# EAGLE board E18 Simple Breakout-Panel (EAGLE 9.6.2)
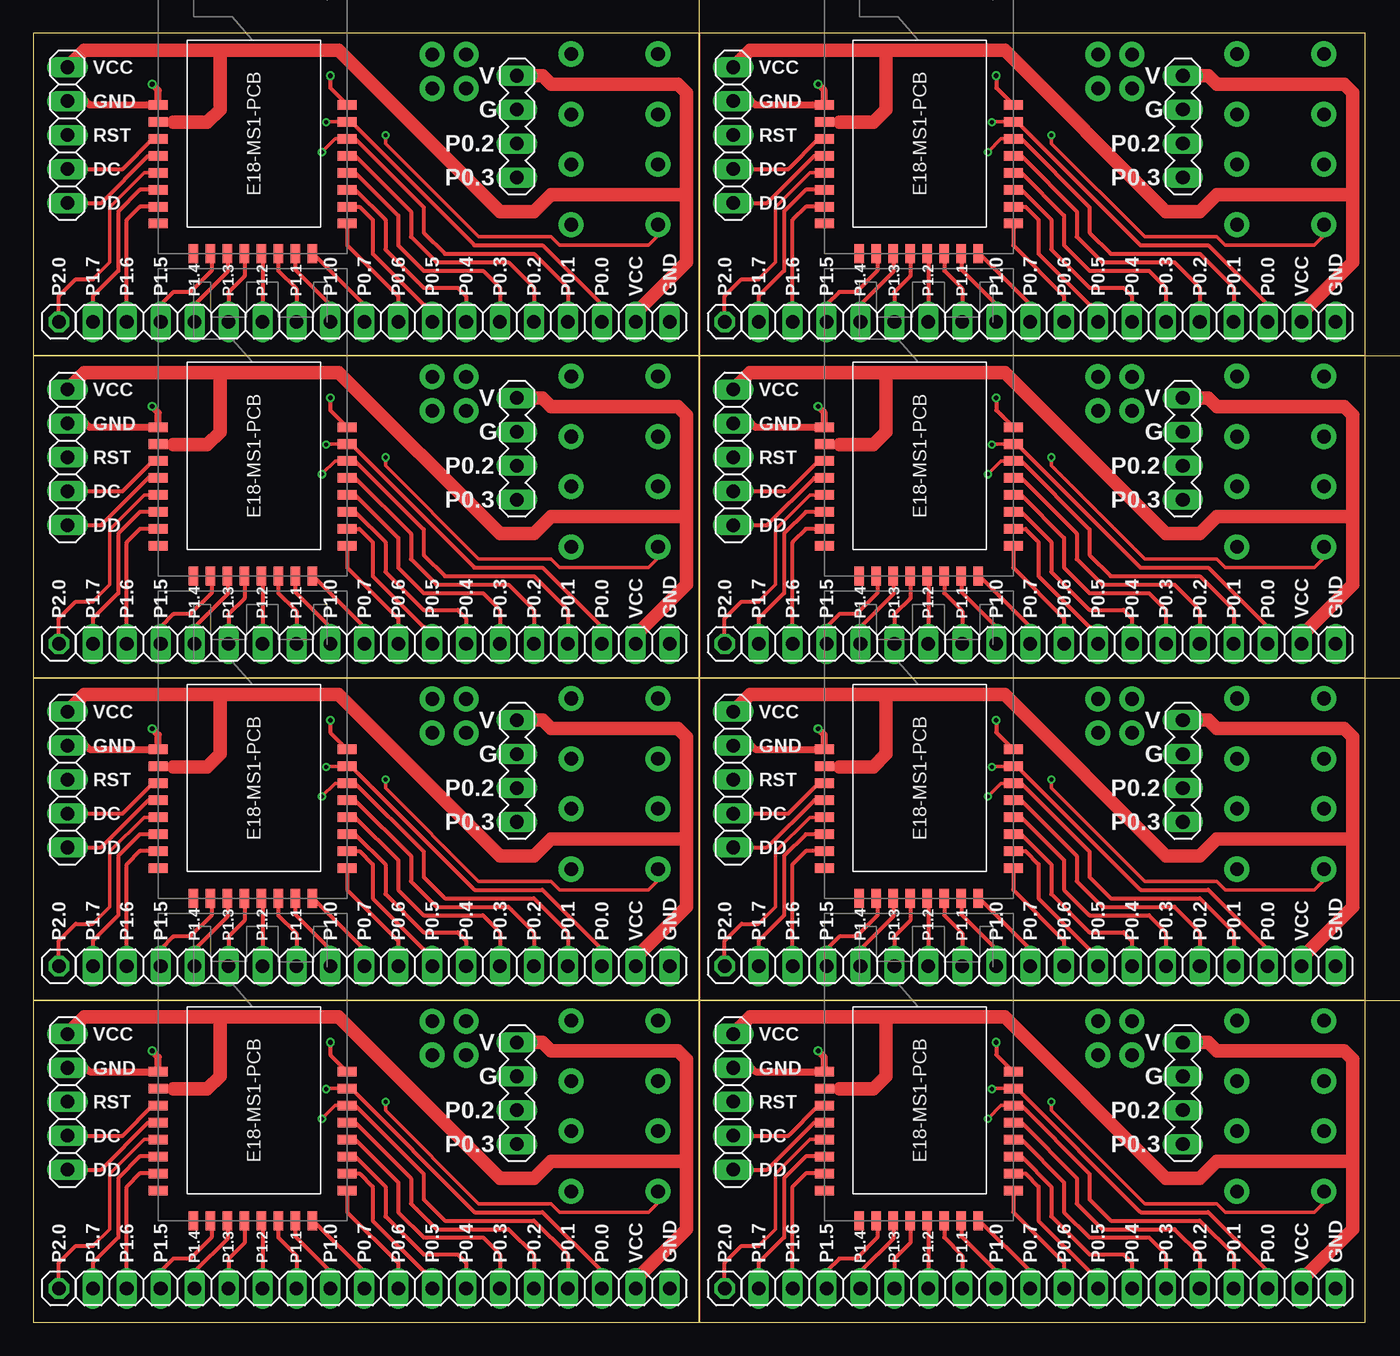
[diagram p0: board, top side]
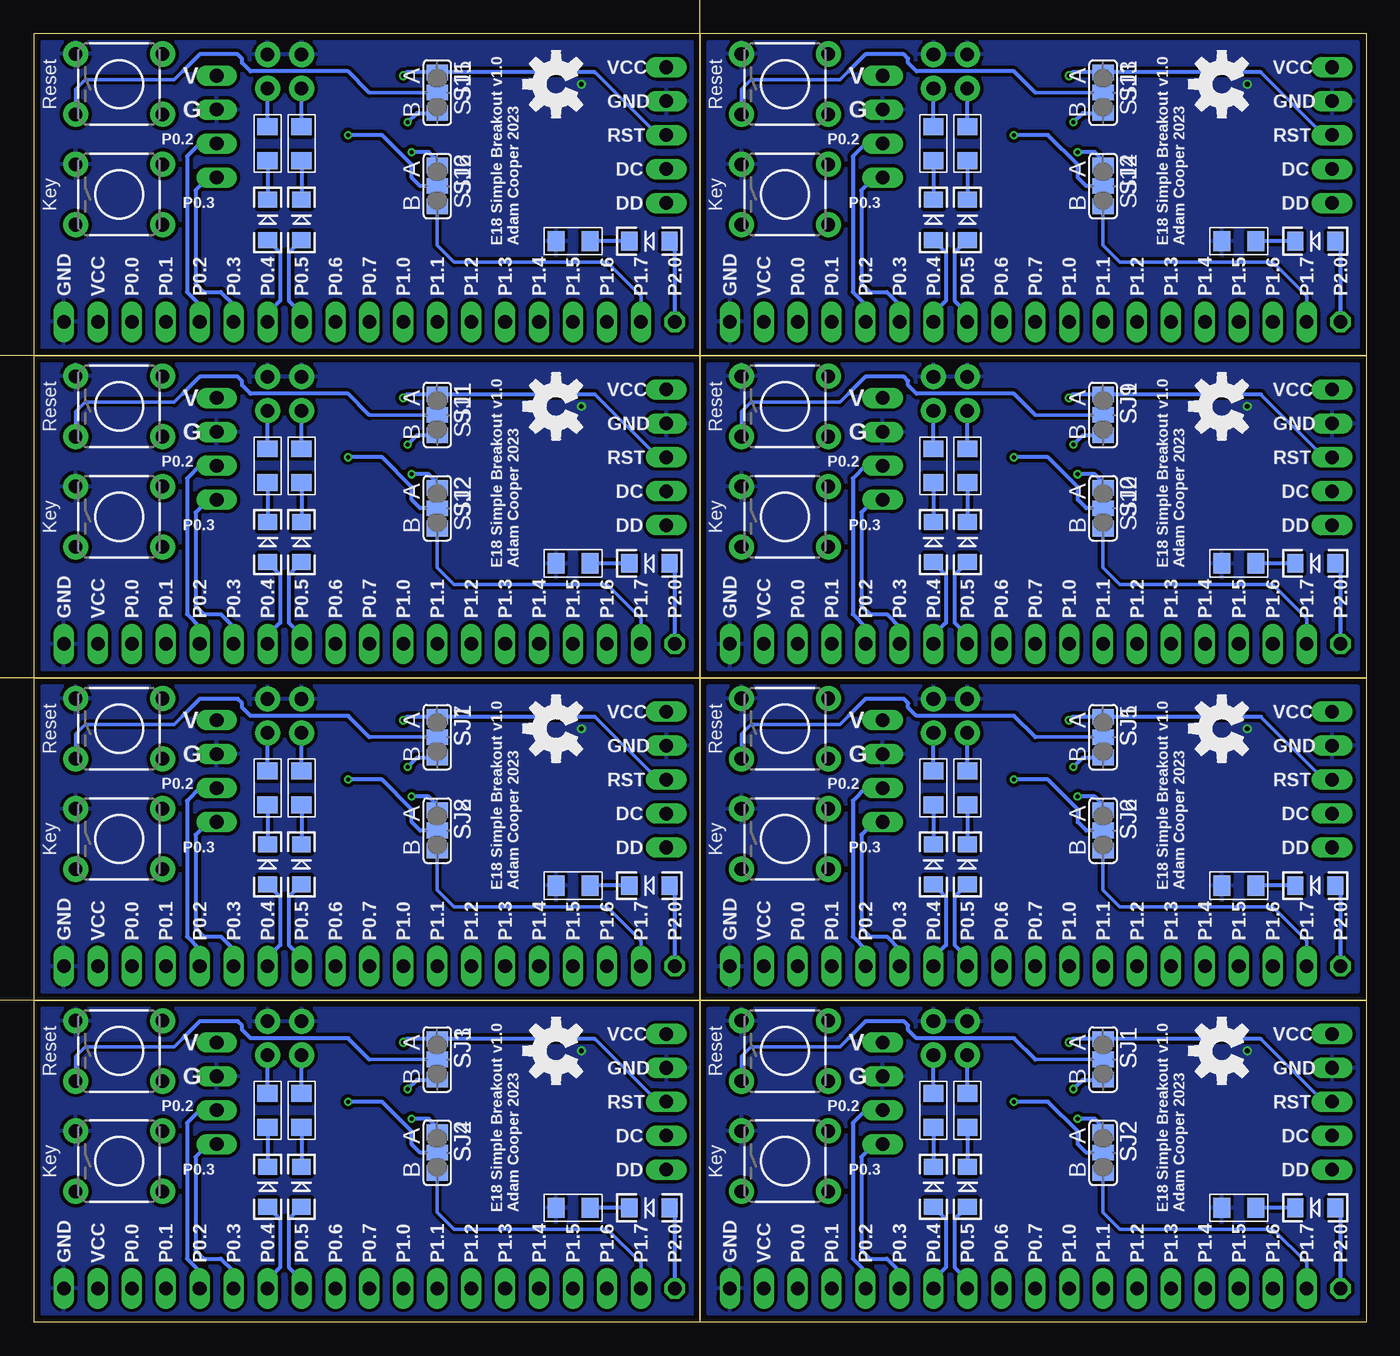
[diagram p1: board, bottom side, seen from below]

Size 99.67 x 96.48 mm. Coordinates in mm from the lower left corner, seen from the top.
Outline: 49.84,24.12 49.84,0 0,0 0,24.12
Outline: 49.84,24.12 0,24.12
Outline: 99.67,24.12 99.67,0 49.84,0 49.84,24.12
Outline: 99.67,24.12 49.84,24.12
Outline: 0,24.12 49.84,24.12
Outline: 49.84,24.12 49.84,48.24
Outline: 49.84,48.24 0,48.24
Outline: 0,48.24 0,24.12
Outline: 49.84,24.12 99.67,24.12
Outline: 99.67,24.12 99.67,48.24
Outline: 99.67,48.24 49.84,48.24
Outline: 49.84,48.24 49.84,24.12
Outline: 0,48.24 49.84,48.24
Outline: 49.84,48.24 49.84,72.36
Outline: 49.84,72.36 0,72.36
Outline: 0,72.36 0,48.24
Outline: 49.84,48.24 99.67,48.24
Outline: 99.67,48.24 99.67,72.36
Outline: 99.67,72.36 49.84,72.36
Outline: 49.84,72.36 49.84,48.24
Outline: 0,72.36 49.84,72.36
Outline: 49.84,72.36 49.84,96.48 0,96.48 0,72.36
Outline: 49.84,72.36 99.67,72.36
Outline: 99.67,72.36 99.67,96.48 49.84,96.48 49.84,72.36
Copper layers (1*16): Top 0.035mm / dielectric 1.5mm / Bottom 0.035mm
Design rules "Seeed Fusion_eagle_rule_v1.1": minimum track width 6mil, minimum drill 12mil, track to track 6mil, track to pad 6mil, pad to pad 6mil, via to via 6mil, smd to smd 0mil, copper to edge 10mil, drill to drill 10mil, minimum pad ring 10mil, minimum via ring 6mil, stop-mask expansion 2mil, vias tented up to drill 100mil, thermal gap 10mil
Milling: 4 lines

## Footprints (pad centres in the part's own frame; a part is rotated, then mirrored left to right if it is on the bottom)
1X05 = drill 1.016 long: 1 -5.08,0; 2 -2.54,0; 3 0,0; 4 2.54,0; 5 5.08,0
1X18 = drill 1.016 long: 1 -21.59,0; 2 -19.05,0; 3 -16.51,0; 4 -13.97,0; 5 -11.43,0; 6 -8.89,0; 7 -6.35,0; 8 -3.81,0; 9 -1.27,0; 10 1.27,0; 11 3.81,0; 12 6.35,0; 13 8.89,0; 14 11.43,0; 15 13.97,0; 16 16.51,0; 17 19.05,0; 18 21.59,0
1X01 = drill 1.016 octagon: 1 0,0
1X02_NO_SILK = drill 1.016 pad 1.88: 1 0,0; 2 2.54,0
LED-1206 = smd 1.2 x 1.4: A -1.5,0; C 1.5,0
1206 = smd 1.27 x 1.524: 1 -1.27,0; 2 1.27,0
TACTILE-PTH = drill 1.016 pad 1.88: 1 -3.251,2.261; 2 3.251,2.261; 3 -3.251,-2.261; 4 3.251,-2.261
SJ_2 = smd 1.168 x 1.6: 1 -1.524,0; 2 0,0; 3 1.524,0
MA04-1 = drill 1.016 long: 1 -3.81,0; 2 -1.27,0; 3 1.27,0; 4 3.81,0
E18-MS1-PCB = smd 0.711 x 1.422: GND 11.15,14.14; NC@1 2.26,14.14; P0.0 9.88,0; P0.1 8.61,0; P0.2 7.34,0; P0.3 6.07,0; P0.4 4.8,0; P0.5 3.53,0; P0.6 2.26,0; P1.6 3.53,14.14; P1.7 4.8,14.14; P2.0 6.07,14.14; P2.1 7.34,14.14; P2.2 8.61,14.14; RST 11.15,0; VCC 9.88,14.14 | smd 1.422 x 0.711: NC@2 0,11.51; P0.7 0,2.62; P1.0 0,3.89; P1.1 0,5.16; P1.2 0,6.43; P1.3 0,7.7; P1.4 0,8.97; P1.5 0,10.24

## Placement (x,y rotation side)
JP1  [1X05]  2.54,16.51 90 top
JP2  [1X18]  26.04,2.54 180 top
JP3  [1X01]  1.91,2.54 0 top
JP4  [1X02_NO_SILK]  32.38,22.54 270 top
JP5  [1X02_NO_SILK]  29.84,22.54 270 top
JP6  [1X05]  52.38,16.51 90 top
JP7  [1X01]  51.74,2.54 0 top
JP8  [1X18]  75.87,2.54 180 top
JP9  [1X02_NO_SILK]  82.22,22.54 270 top
JP10  [1X02_NO_SILK]  79.68,22.54 270 top
JP11  [1X05]  2.54,40.63 90 top
JP12  [1X01]  1.91,26.66 0 top
JP13  [1X18]  26.04,26.66 180 top
JP14  [1X02_NO_SILK]  32.38,46.66 270 top
JP15  [1X02_NO_SILK]  29.84,46.66 270 top
JP16  [1X05]  52.38,40.63 90 top
JP17  [1X01]  51.74,26.66 0 top
JP18  [1X18]  75.87,26.66 180 top
JP19  [1X02_NO_SILK]  82.22,46.66 270 top
JP20  [1X02_NO_SILK]  79.68,46.66 270 top
JP21  [1X05]  2.54,64.75 90 top
JP22  [1X01]  1.91,50.78 0 top
JP23  [1X18]  26.04,50.78 180 top
JP24  [1X02_NO_SILK]  32.38,70.78 270 top
JP25  [1X02_NO_SILK]  29.84,70.78 270 top
JP26  [1X05]  52.38,64.75 90 top
JP27  [1X01]  51.74,50.78 0 top
JP28  [1X18]  75.87,50.78 180 top
JP29  [1X02_NO_SILK]  82.22,70.78 270 top
JP30  [1X02_NO_SILK]  79.68,70.78 270 top
JP31  [1X05]  2.54,88.87 90 top
JP32  [1X01]  1.91,74.9 0 top
JP33  [1X18]  26.04,74.9 180 top
JP34  [1X02_NO_SILK]  32.38,94.9 270 top
JP35  [1X02_NO_SILK]  29.84,94.9 270 top
JP36  [1X05]  52.38,88.87 90 top
JP37  [1X01]  51.74,74.9 0 top
JP38  [1X18]  75.87,74.9 180 top
JP39  [1X02_NO_SILK]  82.22,94.9 270 top
JP40  [1X02_NO_SILK]  79.68,94.9 270 top
LED1  [LED-1206]  3.81,8.57 180 bottom
LED2  [LED-1206]  32.38,10.16 90 bottom
LED3  [LED-1206]  29.84,10.16 90 bottom
LED4  [LED-1206]  53.65,8.57 180 bottom
LED5  [LED-1206]  82.22,10.16 90 bottom
LED6  [LED-1206]  79.68,10.16 90 bottom
LED7  [LED-1206]  3.81,32.69 180 bottom
LED8  [LED-1206]  32.38,34.28 90 bottom
LED9  [LED-1206]  29.84,34.28 90 bottom
LED10  [LED-1206]  53.65,32.69 180 bottom
LED11  [LED-1206]  82.22,34.28 90 bottom
LED12  [LED-1206]  79.68,34.28 90 bottom
LED13  [LED-1206]  3.81,56.81 180 bottom
LED14  [LED-1206]  32.38,58.4 90 bottom
LED15  [LED-1206]  29.84,58.4 90 bottom
LED16  [LED-1206]  53.65,56.81 180 bottom
LED17  [LED-1206]  82.22,58.4 90 bottom
LED18  [LED-1206]  79.68,58.4 90 bottom
LED19  [LED-1206]  3.81,80.93 180 bottom
LED20  [LED-1206]  32.38,82.52 90 bottom
LED21  [LED-1206]  29.84,82.52 90 bottom
LED22  [LED-1206]  53.65,80.93 180 bottom
LED23  [LED-1206]  82.22,82.52 90 bottom
LED24  [LED-1206]  79.68,82.52 90 bottom
LOGO1  OSHW-LOGOM  [OSHW-LOGO-M]  10.79,20.32 90 bottom
LOGO2  OSHW-LOGOM  [OSHW-LOGO-M]  60.63,20.32 90 bottom
LOGO3  OSHW-LOGOM  [OSHW-LOGO-M]  10.79,44.44 90 bottom
LOGO4  OSHW-LOGOM  [OSHW-LOGO-M]  60.63,44.44 90 bottom
LOGO5  OSHW-LOGOM  [OSHW-LOGO-M]  10.79,68.56 90 bottom
LOGO6  OSHW-LOGOM  [OSHW-LOGO-M]  60.63,68.56 90 bottom
LOGO7  OSHW-LOGOM  [OSHW-LOGO-M]  10.79,92.68 90 bottom
LOGO8  OSHW-LOGOM  [OSHW-LOGO-M]  60.63,92.68 90 bottom
R1  [1206]  9.53,8.57 0 bottom
R2  [1206]  32.38,15.88 270 bottom
R3  [1206]  29.84,15.88 270 bottom
R4  [1206]  59.36,8.57 0 bottom
R5  [1206]  82.22,15.88 270 bottom
R6  [1206]  79.68,15.88 270 bottom
R7  [1206]  9.53,32.69 0 bottom
R8  [1206]  32.38,39.99 270 bottom
R9  [1206]  29.84,39.99 270 bottom
R10  [1206]  59.36,32.69 0 bottom
R11  [1206]  82.22,39.99 270 bottom
R12  [1206]  79.68,39.99 270 bottom
R13  [1206]  9.53,56.81 0 bottom
R14  [1206]  32.38,64.11 270 bottom
R15  [1206]  29.84,64.11 270 bottom
R16  [1206]  59.36,56.81 0 bottom
R17  [1206]  82.22,64.11 270 bottom
R18  [1206]  79.68,64.11 270 bottom
R19  [1206]  9.53,80.93 0 bottom
R20  [1206]  32.38,88.23 270 bottom
R21  [1206]  29.84,88.23 270 bottom
R22  [1206]  59.36,80.93 0 bottom
R23  [1206]  82.22,88.23 270 bottom
R24  [1206]  79.68,88.23 270 bottom
S1  Reset  [TACTILE-PTH]  43.5,20.32 0 bottom
S2  Key  [TACTILE-PTH]  43.5,12.06 0 bottom
S3  Reset  [TACTILE-PTH]  93.34,20.32 0 bottom
S4  Key  [TACTILE-PTH]  93.34,12.06 0 bottom
S5  Reset  [TACTILE-PTH]  43.5,44.44 0 bottom
S6  Key  [TACTILE-PTH]  43.5,36.18 0 bottom
S7  Reset  [TACTILE-PTH]  93.34,44.44 0 bottom
S8  Key  [TACTILE-PTH]  93.34,36.18 0 bottom
S9  Reset  [TACTILE-PTH]  43.5,68.56 0 bottom
S10  Key  [TACTILE-PTH]  43.5,60.3 0 bottom
S11  Reset  [TACTILE-PTH]  93.34,68.56 0 bottom
S12  Key  [TACTILE-PTH]  93.34,60.3 0 bottom
S13  Reset  [TACTILE-PTH]  43.5,92.68 0 bottom
S14  Key  [TACTILE-PTH]  43.5,84.42 0 bottom
S15  Reset  [TACTILE-PTH]  93.34,92.68 0 bottom
S16  Key  [TACTILE-PTH]  93.34,84.42 0 bottom
SJ1  [SJ_2]  19.68,19.68 270 bottom
SJ2  [SJ_2]  19.68,12.7 270 bottom
SJ3  [SJ_2]  69.52,19.68 270 bottom
SJ4  [SJ_2]  69.52,12.7 270 bottom
SJ5  [SJ_2]  19.68,43.8 270 bottom
SJ6  [SJ_2]  19.68,36.82 270 bottom
SJ7  [SJ_2]  69.52,43.8 270 bottom
SJ8  [SJ_2]  69.52,36.82 270 bottom
SJ9  [SJ_2]  19.68,67.92 270 bottom
SJ10  [SJ_2]  19.68,60.94 270 bottom
SJ11  [SJ_2]  69.52,67.92 270 bottom
SJ12  [SJ_2]  69.52,60.94 270 bottom
SJ13  [SJ_2]  19.68,92.04 270 bottom
SJ14  [SJ_2]  19.68,85.06 270 bottom
SJ15  [SJ_2]  69.52,92.04 270 bottom
SJ16  [SJ_2]  69.52,85.06 270 bottom
SV1  [MA04-1]  36.2,17.14 270 top
SV2  [MA04-1]  86.03,17.14 270 top
SV3  [MA04-1]  36.2,41.26 270 top
SV4  [MA04-1]  86.03,41.26 270 top
SV5  [MA04-1]  36.2,65.38 270 top
SV6  [MA04-1]  86.03,65.38 270 top
SV7  [MA04-1]  36.2,89.5 270 top
SV8  [MA04-1]  86.03,89.5 270 top
U$1  E18-MS1PCB  [E18-MS1-PCB]  23.5,7.62 90 top
U$2  E18-MS1PCB  [E18-MS1-PCB]  73.33,7.62 90 top
U$3  E18-MS1PCB  [E18-MS1-PCB]  23.5,31.74 90 top
U$4  E18-MS1PCB  [E18-MS1-PCB]  73.33,31.74 90 top
U$5  E18-MS1PCB  [E18-MS1-PCB]  23.5,55.86 90 top
U$6  E18-MS1PCB  [E18-MS1-PCB]  73.33,55.86 90 top
U$7  E18-MS1PCB  [E18-MS1-PCB]  23.5,79.98 90 top
U$8  E18-MS1PCB  [E18-MS1-PCB]  73.33,79.98 90 top

## Library data of the parts
JP1-JP3 JP6-JP8 JP11-JP13 JP16-JP18 JP21-JP23 JP26-JP28 JP31-JP33 JP36-JP38 = pinhead
JP4 JP5 JP9 JP10 JP14 JP15 JP19 JP20 JP24 JP25 JP29 JP30 JP34 JP35 JP39 JP40 LED1-LED24 LOGO1-LOGO8 R1-R24 S1-S16 SJ1-SJ16 = Master 2016
SV1-SV8 = Master 2016; OC_FARNELL: unknown; OC_NEWARK: unknown
U$1-U$8 = SMD Stamp Modules

## Nets
GND: JP1.4 JP2.1 JP4.1 JP5.1 R1.1 S1.1 S2.1 SV1.2 U$1.GND
GND1: JP6.4 JP8.1 JP9.1 JP10.1 R4.1 S3.1 S4.1 SV2.2 U$2.GND
GND2: JP11.4 JP13.1 JP14.1 JP15.1 R7.1 S5.1 S6.1 SV3.2 U$3.GND
GND3: JP16.4 JP18.1 JP19.1 JP20.1 R10.1 S7.1 S8.1 SV4.2 U$4.GND
GND4: JP21.4 JP23.1 JP24.1 JP25.1 R13.1 S9.1 S10.1 SV5.2 U$5.GND
GND5: JP26.4 JP28.1 JP29.1 JP30.1 R16.1 S11.1 S12.1 SV6.2 U$6.GND
GND6: JP31.4 JP33.1 JP34.1 JP35.1 R19.1 S13.1 S14.1 SV7.2 U$7.GND
GND7: JP36.4 JP38.1 JP39.1 JP40.1 R22.1 S15.1 S16.1 SV8.2 U$8.GND
N$1: LED3.C R3.2
N$2: S1.3 SJ1.2
N$3: JP4.2 R2.1
N$4: JP5.2 R3.1
N$5: S2.3 SJ2.2
N$6: LED2.C R2.2
N$7: LED1.C R1.2
N$8: S3.3 SJ3.2
N$9: JP9.2 R5.1
N$10: JP10.2 R6.1
N$11: S4.3 SJ4.2
N$12: LED6.C R6.2
N$13: LED5.C R5.2
N$14: LED4.C R4.2
N$15: S5.3 SJ5.2
N$16: JP14.2 R8.1
N$17: JP15.2 R9.1
N$18: S6.3 SJ6.2
N$19: LED9.C R9.2
N$20: LED8.C R8.2
N$21: LED7.C R7.2
N$22: S7.3 SJ7.2
N$23: JP19.2 R11.1
N$24: JP20.2 R12.1
N$25: S8.3 SJ8.2
N$26: LED12.C R12.2
N$27: LED11.C R11.2
N$28: LED10.C R10.2
N$29: S9.3 SJ9.2
N$30: JP24.2 R14.1
N$31: JP25.2 R15.1
N$32: S10.3 SJ10.2
N$33: LED15.C R15.2
N$34: LED14.C R14.2
N$35: LED13.C R13.2
N$36: S11.3 SJ11.2
N$37: JP29.2 R17.1
N$38: JP30.2 R18.1
N$39: S12.3 SJ12.2
N$40: LED18.C R18.2
N$41: LED17.C R17.2
N$42: LED16.C R16.2
N$43: S13.3 SJ13.2
N$44: JP34.2 R20.1
N$45: JP35.2 R21.1
N$46: S14.3 SJ14.2
N$47: LED21.C R21.2
N$48: LED20.C R20.2
N$49: LED19.C R19.2
N$50: S15.3 SJ15.2
N$51: JP39.2 R23.1
N$52: JP40.2 R24.1
N$53: S16.3 SJ16.2
N$54: LED24.C R24.2
N$55: LED23.C R23.2
N$56: LED22.C R22.2
P0_0: JP2.3 SJ1.3 U$1.P0.0
P0_1: JP2.4 SJ2.1 U$1.P0.1
P0_2: JP2.5 SV1.3 U$1.P0.2
P0_3: JP2.6 SV1.4 U$1.P0.3
P0_4: JP2.7 LED2.A U$1.P0.4
P0_5: JP2.8 LED3.A U$1.P0.5
P0_6: JP2.9 U$1.P0.6
P0_7: JP2.10 U$1.P0.7
P0_8: JP8.3 SJ3.3 U$2.P0.0
P0_9: JP8.4 SJ4.1 U$2.P0.1
P0_10: JP8.5 SV2.3 U$2.P0.2
P0_11: JP8.6 SV2.4 U$2.P0.3
P0_12: JP8.7 LED5.A U$2.P0.4
P0_13: JP8.8 LED6.A U$2.P0.5
P0_14: JP8.9 U$2.P0.6
P0_15: JP8.10 U$2.P0.7
P0_16: JP13.3 SJ5.3 U$3.P0.0
P0_17: JP13.4 SJ6.1 U$3.P0.1
P0_18: JP13.5 SV3.3 U$3.P0.2
P0_19: JP13.6 SV3.4 U$3.P0.3
P0_20: JP13.7 LED8.A U$3.P0.4
P0_21: JP13.8 LED9.A U$3.P0.5
P0_22: JP13.9 U$3.P0.6
P0_23: JP13.10 U$3.P0.7
P0_24: JP18.3 SJ7.3 U$4.P0.0
P0_25: JP18.4 SJ8.1 U$4.P0.1
P0_26: JP18.5 SV4.3 U$4.P0.2
P0_27: JP18.6 SV4.4 U$4.P0.3
P0_28: JP18.7 LED11.A U$4.P0.4
P0_29: JP18.8 LED12.A U$4.P0.5
P0_30: JP18.9 U$4.P0.6
P0_31: JP18.10 U$4.P0.7
P0_32: JP23.3 SJ9.3 U$5.P0.0
P0_33: JP23.4 SJ10.1 U$5.P0.1
P0_34: JP23.5 SV5.3 U$5.P0.2
P0_35: JP23.6 SV5.4 U$5.P0.3
P0_36: JP23.7 LED14.A U$5.P0.4
P0_37: JP23.8 LED15.A U$5.P0.5
P0_38: JP23.9 U$5.P0.6
P0_39: JP23.10 U$5.P0.7
P0_40: JP28.3 SJ11.3 U$6.P0.0
P0_41: JP28.4 SJ12.1 U$6.P0.1
P0_42: JP28.5 SV6.3 U$6.P0.2
P0_43: JP28.6 SV6.4 U$6.P0.3
P0_44: JP28.7 LED17.A U$6.P0.4
P0_45: JP28.8 LED18.A U$6.P0.5
P0_46: JP28.9 U$6.P0.6
P0_47: JP28.10 U$6.P0.7
P0_48: JP33.3 SJ13.3 U$7.P0.0
P0_49: JP33.4 SJ14.1 U$7.P0.1
P0_50: JP33.5 SV7.3 U$7.P0.2
P0_51: JP33.6 SV7.4 U$7.P0.3
P0_52: JP33.7 LED20.A U$7.P0.4
P0_53: JP33.8 LED21.A U$7.P0.5
P0_54: JP33.9 U$7.P0.6
P0_55: JP33.10 U$7.P0.7
P0_56: JP38.3 SJ15.3 U$8.P0.0
P0_57: JP38.4 SJ16.1 U$8.P0.1
P0_58: JP38.5 SV8.3 U$8.P0.2
P0_59: JP38.6 SV8.4 U$8.P0.3
P0_60: JP38.7 LED23.A U$8.P0.4
P0_61: JP38.8 LED24.A U$8.P0.5
P0_62: JP38.9 U$8.P0.6
P0_63: JP38.10 U$8.P0.7
P1_0: JP2.11 U$1.P1.0
P1_1: JP2.12 U$1.P1.1
P1_2: JP2.13 U$1.P1.2
P1_3: JP2.14 U$1.P1.3
P1_4: JP2.15 U$1.P1.4
P1_5: JP2.16 U$1.P1.5
P1_6: JP2.17 U$1.P1.6
P1_7: JP2.18 SJ2.3 U$1.P1.7
P1_8: JP8.18 SJ4.3 U$2.P1.7
P1_9: JP8.17 U$2.P1.6
P1_10: JP8.16 U$2.P1.5
P1_11: JP8.15 U$2.P1.4
P1_12: JP8.14 U$2.P1.3
P1_13: JP8.13 U$2.P1.2
P1_14: JP8.12 U$2.P1.1
P1_15: JP8.11 U$2.P1.0
P1_16: JP13.18 SJ6.3 U$3.P1.7
P1_17: JP13.17 U$3.P1.6
P1_18: JP13.16 U$3.P1.5
P1_19: JP13.15 U$3.P1.4
P1_20: JP13.14 U$3.P1.3
P1_21: JP13.13 U$3.P1.2
P1_22: JP13.12 U$3.P1.1
P1_23: JP13.11 U$3.P1.0
P1_24: JP18.18 SJ8.3 U$4.P1.7
P1_25: JP18.17 U$4.P1.6
P1_26: JP18.16 U$4.P1.5
P1_27: JP18.15 U$4.P1.4
P1_28: JP18.14 U$4.P1.3
P1_29: JP18.13 U$4.P1.2
P1_30: JP18.12 U$4.P1.1
P1_31: JP18.11 U$4.P1.0
P1_32: JP23.18 SJ10.3 U$5.P1.7
P1_33: JP23.17 U$5.P1.6
P1_34: JP23.16 U$5.P1.5
P1_35: JP23.15 U$5.P1.4
P1_36: JP23.14 U$5.P1.3
P1_37: JP23.13 U$5.P1.2
P1_38: JP23.12 U$5.P1.1
P1_39: JP23.11 U$5.P1.0
P1_40: JP28.18 SJ12.3 U$6.P1.7
P1_41: JP28.17 U$6.P1.6
P1_42: JP28.16 U$6.P1.5
P1_43: JP28.15 U$6.P1.4
P1_44: JP28.14 U$6.P1.3
P1_45: JP28.13 U$6.P1.2
P1_46: JP28.12 U$6.P1.1
P1_47: JP28.11 U$6.P1.0
P1_48: JP33.18 SJ14.3 U$7.P1.7
P1_49: JP33.17 U$7.P1.6
P1_50: JP33.16 U$7.P1.5
P1_51: JP33.15 U$7.P1.4
P1_52: JP33.14 U$7.P1.3
P1_53: JP33.13 U$7.P1.2
P1_54: JP33.12 U$7.P1.1
P1_55: JP33.11 U$7.P1.0
P1_56: JP38.18 SJ16.3 U$8.P1.7
P1_57: JP38.17 U$8.P1.6
P1_58: JP38.16 U$8.P1.5
P1_59: JP38.15 U$8.P1.4
P1_60: JP38.14 U$8.P1.3
P1_61: JP38.13 U$8.P1.2
P1_62: JP38.12 U$8.P1.1
P1_63: JP38.11 U$8.P1.0
P2_0: JP3.1 LED1.A U$1.P2.0
P2_1: JP1.1 U$1.P2.1
P2_2: JP1.2 U$1.P2.2
P2_3: JP6.2 U$2.P2.2
P2_4: JP6.1 U$2.P2.1
P2_5: JP7.1 LED4.A U$2.P2.0
P2_6: JP11.2 U$3.P2.2
P2_7: JP11.1 U$3.P2.1
P2_8: JP12.1 LED7.A U$3.P2.0
P2_9: JP16.2 U$4.P2.2
P2_10: JP16.1 U$4.P2.1
P2_11: JP17.1 LED10.A U$4.P2.0
P2_12: JP21.2 U$5.P2.2
P2_13: JP21.1 U$5.P2.1
P2_14: JP22.1 LED13.A U$5.P2.0
P2_15: JP26.2 U$6.P2.2
P2_16: JP26.1 U$6.P2.1
P2_17: JP27.1 LED16.A U$6.P2.0
P2_18: JP31.2 U$7.P2.2
P2_19: JP31.1 U$7.P2.1
P2_20: JP32.1 LED19.A U$7.P2.0
P2_21: JP36.2 U$8.P2.2
P2_22: JP36.1 U$8.P2.1
P2_23: JP37.1 LED22.A U$8.P2.0
RST: JP1.3 SJ1.1 U$1.RST
RST1: JP6.3 SJ3.1 U$2.RST
RST2: JP11.3 SJ5.1 U$3.RST
RST3: JP16.3 SJ7.1 U$4.RST
RST4: JP21.3 SJ9.1 U$5.RST
RST5: JP26.3 SJ11.1 U$6.RST
RST6: JP31.3 SJ13.1 U$7.RST
RST7: JP36.3 SJ15.1 U$8.RST
VCC: JP1.5 JP2.2 SV1.1 U$1.VCC
VCC1: JP6.5 JP8.2 SV2.1 U$2.VCC
VCC2: JP11.5 JP13.2 SV3.1 U$3.VCC
VCC3: JP16.5 JP18.2 SV4.1 U$4.VCC
VCC4: JP21.5 JP23.2 SV5.1 U$5.VCC
VCC5: JP26.5 JP28.2 SV6.1 U$6.VCC
VCC6: JP31.5 JP33.2 SV7.1 U$7.VCC
VCC7: JP36.5 JP38.2 SV8.1 U$8.VCC

## Tracks (layer width: path | path; a pad name or v marks a point on that pad's centre or on a via)
GND  (via drill 0.35 pad 0.61)
  Top 0.508: v8.89,20.32 9.36,19.86 U$1.GND 4.2,18.77 3.92,19.05 JP1.4
  pour Bottom (isolate 0.254): 0.64,23.5 0.64,0.64 49.21,0.64 49.21,23.5
GND1  (via drill 0.35 pad 0.61)
  Top 0.508: v58.73,20.32 59.2,19.86 U$2.GND 54.04,18.77 53.76,19.05 JP6.4
  pour Bottom (isolate 0.254): 50.47,23.5 50.47,0.64 99.05,0.64 99.05,23.5
GND2  (via drill 0.35 pad 0.61)
  Top 0.508: v8.89,44.44 9.36,43.98 U$3.GND 4.2,42.89 3.92,43.17 JP11.4
  pour Bottom (isolate 0.254): 0.64,47.61 0.64,24.75 49.21,24.75 49.21,47.61
GND3  (via drill 0.35 pad 0.61)
  Top 0.508: v58.73,44.44 59.2,43.98 U$4.GND 54.04,42.89 53.76,43.17 JP16.4
  pour Bottom (isolate 0.254): 50.47,47.61 50.47,24.75 99.05,24.75 99.05,47.61
GND4  (via drill 0.35 pad 0.61)
  Top 0.508: v8.89,68.56 9.36,68.09 U$5.GND 4.2,67.01 3.92,67.29 JP21.4
  pour Bottom (isolate 0.254): 0.64,71.73 0.64,48.87 49.21,48.87 49.21,71.73
GND5  (via drill 0.35 pad 0.61)
  Top 0.508: v58.73,68.56 59.2,68.09 U$6.GND 54.04,67.01 53.76,67.29 JP26.4
  pour Bottom (isolate 0.254): 50.47,71.73 50.47,48.87 99.05,48.87 99.05,71.73
GND6  (via drill 0.35 pad 0.61)
  Top 0.508: v8.89,92.68 9.36,92.22 U$7.GND 4.2,91.13 3.92,91.41 JP31.4
  pour Bottom (isolate 0.254): 0.64,95.85 0.64,72.99 49.21,72.99 49.21,95.85
GND7  (via drill 0.35 pad 0.61)
  Top 0.508: v58.73,92.68 59.2,92.22 U$8.GND 54.04,91.13 53.76,91.41 JP36.4
  pour Bottom (isolate 0.254): 50.47,95.85 50.47,72.99 99.05,72.99 99.05,95.85
N$1
  Bottom 0.305: R3.2 LED3.C
N$2
  Bottom 0.254: 38.73,21.27 39.37,20.64 46.04,20.64 46.75,19.93 S1.3 | SJ1.2 24.77,19.68
  Bottom 0.305: 24.77,19.68 26.35,21.27 33.66,21.27 34.29,21.91 34.29,22.23 34.61,22.54 37.47,22.54 38.73,21.27
N$3
  Bottom 0.305: R2.1 JP4.2
N$4
  Bottom 0.305: R3.1 JP5.2
N$5  (via drill 0.3 pad 0.61)
  Top 0.254: S2.3 46.75,8.97 46.04,8.26 39.37,8.26 38.73,8.89 33.34,8.89 26.35,15.88 v26.35,16.51
  Bottom 0.305: SJ2.2 20.95,12.7 21.59,13.34 21.59,14.29 23.81,16.51 v26.35,16.51
N$6
  Bottom 0.305: R2.2 LED2.C
N$7
  Bottom 0.305: LED1.C R1.2
N$8
  Bottom 0.254: 88.58,21.27 89.21,20.64 95.88,20.64 96.59,19.93 S3.3 | SJ3.2 74.61,19.68
  Bottom 0.305: 74.61,19.68 76.19,21.27 83.5,21.27 84.13,21.91 84.13,22.23 84.45,22.54 87.31,22.54 88.58,21.27
N$9
  Bottom 0.305: R5.1 JP9.2
N$10
  Bottom 0.305: R6.1 JP10.2
N$11  (via drill 0.3 pad 0.61)
  Top 0.254: S4.3 96.59,8.97 95.88,8.26 89.21,8.26 88.58,8.89 83.18,8.89 76.19,15.88 v76.19,16.51
  Bottom 0.305: SJ4.2 70.8,12.7 71.43,13.34 71.43,14.29 73.65,16.51 v76.19,16.51
N$12
  Bottom 0.305: R6.2 LED6.C
N$13
  Bottom 0.305: R5.2 LED5.C
N$14
  Bottom 0.305: LED4.C R4.2
N$15
  Bottom 0.254: 38.73,45.39 39.37,44.76 46.04,44.76 46.75,44.05 S5.3 | SJ5.2 24.77,43.8
  Bottom 0.305: 24.77,43.8 26.35,45.39 33.66,45.39 34.29,46.03 34.29,46.34 34.61,46.66 37.47,46.66 38.73,45.39
N$16
  Bottom 0.305: R8.1 JP14.2
N$17
  Bottom 0.305: R9.1 JP15.2
N$18  (via drill 0.3 pad 0.61)
  Top 0.254: S6.3 46.75,33.09 46.04,32.38 39.37,32.38 38.73,33.01 33.34,33.01 26.35,39.99 v26.35,40.63
  Bottom 0.305: SJ6.2 20.95,36.82 21.59,37.45 21.59,38.41 23.81,40.63 v26.35,40.63
N$19
  Bottom 0.305: R9.2 LED9.C
N$20
  Bottom 0.305: R8.2 LED8.C
N$21
  Bottom 0.305: LED7.C R7.2
N$22
  Bottom 0.254: 88.58,45.39 89.21,44.76 95.88,44.76 96.59,44.05 S7.3 | SJ7.2 74.61,43.8
  Bottom 0.305: 74.61,43.8 76.19,45.39 83.5,45.39 84.13,46.03 84.13,46.34 84.45,46.66 87.31,46.66 88.58,45.39
N$23
  Bottom 0.305: R11.1 JP19.2
N$24
  Bottom 0.305: R12.1 JP20.2
N$25  (via drill 0.3 pad 0.61)
  Top 0.254: S8.3 96.59,33.09 95.88,32.38 89.21,32.38 88.58,33.01 83.18,33.01 76.19,39.99 v76.19,40.63
  Bottom 0.305: SJ8.2 70.8,36.82 71.43,37.45 71.43,38.41 73.65,40.63 v76.19,40.63
N$26
  Bottom 0.305: R12.2 LED12.C
N$27
  Bottom 0.305: R11.2 LED11.C
N$28
  Bottom 0.305: LED10.C R10.2
N$29
  Bottom 0.254: 38.73,69.51 39.37,68.88 46.04,68.88 46.75,68.17 S9.3 | SJ9.2 24.77,67.92
  Bottom 0.305: 24.77,67.92 26.35,69.51 33.66,69.51 34.29,70.15 34.29,70.47 34.61,70.78 37.47,70.78 38.73,69.51
N$30
  Bottom 0.305: R14.1 JP24.2
N$31
  Bottom 0.305: R15.1 JP25.2
N$32  (via drill 0.3 pad 0.61)
  Top 0.254: S10.3 46.75,57.21 46.04,56.49 39.37,56.49 38.73,57.13 33.34,57.13 26.35,64.11 v26.35,64.75
  Bottom 0.305: SJ10.2 20.95,60.94 21.59,61.58 21.59,62.53 23.81,64.75 v26.35,64.75
N$33
  Bottom 0.305: R15.2 LED15.C
N$34
  Bottom 0.305: R14.2 LED14.C
N$35
  Bottom 0.305: LED13.C R13.2
N$36
  Bottom 0.254: 88.58,69.51 89.21,68.88 95.88,68.88 96.59,68.17 S11.3 | SJ11.2 74.61,67.92
  Bottom 0.305: 74.61,67.92 76.19,69.51 83.5,69.51 84.13,70.15 84.13,70.47 84.45,70.78 87.31,70.78 88.58,69.51
N$37
  Bottom 0.305: R17.1 JP29.2
N$38
  Bottom 0.305: R18.1 JP30.2
N$39  (via drill 0.3 pad 0.61)
  Top 0.254: S12.3 96.59,57.21 95.88,56.49 89.21,56.49 88.58,57.13 83.18,57.13 76.19,64.11 v76.19,64.75
  Bottom 0.305: SJ12.2 70.8,60.94 71.43,61.58 71.43,62.53 73.65,64.75 v76.19,64.75
N$40
  Bottom 0.305: R18.2 LED18.C
N$41
  Bottom 0.305: R17.2 LED17.C
N$42
  Bottom 0.305: LED16.C R16.2
N$43
  Bottom 0.254: 38.73,93.63 39.37,93 46.04,93 46.75,92.29 S13.3 | SJ13.2 24.77,92.05
  Bottom 0.305: 24.77,92.05 26.35,93.63 33.66,93.63 34.29,94.27 34.29,94.58 34.61,94.9 37.47,94.9 38.73,93.63
N$44
  Bottom 0.305: R20.1 JP34.2
N$45
  Bottom 0.305: R21.1 JP35.2
N$46  (via drill 0.3 pad 0.61)
  Top 0.254: S14.3 46.75,81.33 46.04,80.61 39.37,80.61 38.73,81.25 33.34,81.25 26.35,88.23 v26.35,88.87
  Bottom 0.305: SJ14.2 20.95,85.06 21.59,85.69 21.59,86.65 23.81,88.87 v26.35,88.87
N$47
  Bottom 0.305: R21.2 LED21.C
N$48
  Bottom 0.305: R20.2 LED20.C
N$49
  Bottom 0.305: LED19.C R19.2
N$50
  Bottom 0.254: 88.58,93.63 89.21,93 95.88,93 96.59,92.29 S15.3 | SJ15.2 74.61,92.05
  Bottom 0.305: 74.61,92.05 76.19,93.63 83.5,93.63 84.13,94.27 84.13,94.58 84.45,94.9 87.31,94.9 88.58,93.63
N$51
  Bottom 0.305: R23.1 JP39.2
N$52
  Bottom 0.305: R24.1 JP40.2
N$53  (via drill 0.3 pad 0.61)
  Top 0.254: S16.3 96.59,81.33 95.88,80.61 89.21,80.61 88.58,81.25 83.18,81.25 76.19,88.23 v76.19,88.87
  Bottom 0.305: SJ16.2 70.8,85.06 71.43,85.69 71.43,86.65 73.65,88.87 v76.19,88.87
N$54
  Bottom 0.305: R24.2 LED24.C
N$55
  Bottom 0.305: R23.2 LED23.C
N$56
  Bottom 0.305: LED22.C R22.2
P0_0  (via drill 0.3 pad 0.61)
  Top 0.254: v21.91,17.46 21.95,17.5 23.81,17.5
  Top 0.305: U$1.P0.0 23.81,17.5 23.81,17.46 33.02,8.26 38.1,8.26 42.55,3.81 JP2.3
  Bottom 0.305: v21.91,17.46 21.21,18.16 SJ1.3
P0_1  (via drill 0.3 pad 0.61)
  Top 0.254: v21.59,15.24 22.58,16.23 U$1.P0.1
  Top 0.305: U$1.P0.1 24.09,16.23 29.21,11.11 29.21,9.21 30.8,7.62 37.47,7.62 40.01,5.08 JP2.4
  Bottom 0.254: SJ2.1 19.68,14.61
  Bottom 0.305: 19.68,14.61 20.32,15.24 v21.59,15.24
P0_2
  Top 0.305: U$1.P0.2 24.09,14.96 28.26,10.79 28.26,8.89 30.16,6.99 35.56,6.99 37.47,5.08 JP2.5
  Bottom 0.305: SV1.3 37.47,15.88 38.42,14.92 38.42,4.76 37.47,3.81 JP2.5
P0_3
  Top 0.305: U$1.P0.3 24.09,13.69 27.3,10.48 27.3,8.26 29.21,6.35 33.66,6.35 34.92,5.08 JP2.6
  Bottom 0.305: SV1.4 36.83,13.34 37.78,12.38 37.78,5.4 37.15,4.76 35.88,4.76 34.92,3.81 JP2.6
P0_4
  Top 0.305: U$1.P0.4 24.09,12.42 26.35,10.16 26.35,7.94 29.21,5.08 31.75,5.08 32.38,4.45 JP2.7
  Bottom 0.305: LED2.A 31.43,7.71 31.43,4.13 32.38,3.17 JP2.7
P0_5
  Top 0.305: U$1.P0.5 24.41,11.15 25.4,10.16 25.4,7.62 29.21,3.81 29.84,3.81 JP2.8
  Bottom 0.305: LED3.A 30.8,7.71 30.8,4.13 29.84,3.17 JP2.8
P0_6
  Top 0.305: U$1.P0.6 23.5,8.26 27.3,4.45 JP2.9
P0_7
  Top 0.305: U$1.P0.7 20.95,7.62 24.77,3.81 JP2.10
P0_8  (via drill 0.3 pad 0.61)
  Top 0.254: v71.75,17.46 71.78,17.5 73.65,17.5
  Top 0.305: U$2.P0.0 73.65,17.5 73.65,17.46 82.86,8.26 87.94,8.26 92.39,3.81 JP8.3
  Bottom 0.305: v71.75,17.46 71.05,18.16 SJ3.3
P0_9  (via drill 0.3 pad 0.61)
  Top 0.254: v71.43,15.24 72.42,16.23 U$2.P0.1
  Top 0.305: U$2.P0.1 73.93,16.23 79.05,11.11 79.05,9.21 80.64,7.62 87.31,7.62 89.84,5.08 JP8.4
  Bottom 0.254: SJ4.1 69.53,14.61
  Bottom 0.305: 69.53,14.61 70.16,15.24 v71.43,15.24
P0_10
  Top 0.305: U$2.P0.2 73.93,14.96 78.1,10.79 78.1,8.89 80,6.99 85.4,6.99 87.31,5.08 JP8.5
  Bottom 0.305: SV2.3 87.31,15.88 88.26,14.92 88.26,4.76 87.31,3.81 JP8.5
P0_11
  Top 0.305: U$2.P0.3 73.93,13.69 77.14,10.48 77.14,8.26 79.05,6.35 83.5,6.35 84.77,5.08 JP8.6
  Bottom 0.305: SV2.4 86.67,13.34 87.62,12.38 87.62,5.4 86.99,4.76 85.72,4.76 84.77,3.81 JP8.6
P0_12
  Top 0.305: U$2.P0.4 73.93,12.42 76.19,10.16 76.19,7.94 79.05,5.08 81.59,5.08 82.22,4.45 JP8.7
  Bottom 0.305: LED5.A 81.27,7.71 81.27,4.13 82.22,3.17 JP8.7
P0_13
  Top 0.305: U$2.P0.5 74.25,11.15 75.24,10.16 75.24,7.62 79.05,3.81 79.69,3.81 JP8.8
  Bottom 0.305: LED6.A 80.64,7.71 80.64,4.13 79.69,3.17 JP8.8
P0_14
  Top 0.305: U$2.P0.6 73.33,8.26 77.14,4.45 JP8.9
P0_15
  Top 0.305: U$2.P0.7 70.8,7.62 74.61,3.81 JP8.10
P0_16  (via drill 0.3 pad 0.61)
  Top 0.254: v21.91,41.58 21.95,41.62 23.81,41.62
  Top 0.305: U$3.P0.0 23.81,41.62 23.81,41.58 33.02,32.38 38.1,32.38 42.55,27.93 JP13.3
  Bottom 0.305: v21.91,41.58 21.21,42.28 SJ5.3
P0_17  (via drill 0.3 pad 0.61)
  Top 0.254: v21.59,39.36 22.58,40.35 U$3.P0.1
  Top 0.305: U$3.P0.1 24.09,40.35 29.21,35.23 29.21,33.33 30.8,31.74 37.47,31.74 40.01,29.2 JP13.4
  Bottom 0.254: SJ6.1 19.68,38.73
  Bottom 0.305: 19.68,38.73 20.32,39.36 v21.59,39.36
P0_18
  Top 0.305: U$3.P0.2 24.09,39.08 28.26,34.91 28.26,33.01 30.16,31.11 35.56,31.11 37.47,29.2 JP13.5
  Bottom 0.305: SV3.3 37.47,39.99 38.42,39.04 38.42,28.88 37.47,27.93 JP13.5
P0_19
  Top 0.305: U$3.P0.3 24.09,37.81 27.3,34.6 27.3,32.38 29.21,30.47 33.66,30.47 34.92,29.2 JP13.6
  Bottom 0.305: SV3.4 36.83,37.45 37.78,36.5 37.78,29.52 37.15,28.88 35.88,28.88 34.92,27.93 JP13.6
P0_20
  Top 0.305: U$3.P0.4 24.09,36.54 26.35,34.28 26.35,32.06 29.21,29.2 31.75,29.2 32.38,28.57 JP13.7
  Bottom 0.305: LED8.A 31.43,31.83 31.43,28.25 32.38,27.3 JP13.7
P0_21
  Top 0.305: U$3.P0.5 24.41,35.27 25.4,34.28 25.4,31.74 29.21,27.93 29.84,27.93 JP13.8
  Bottom 0.305: LED9.A 30.8,31.83 30.8,28.25 29.84,27.3 JP13.8
P0_22
  Top 0.305: U$3.P0.6 23.5,32.38 27.3,28.57 JP13.9
P0_23
  Top 0.305: U$3.P0.7 20.95,31.74 24.77,27.93 JP13.10
P0_24  (via drill 0.3 pad 0.61)
  Top 0.254: v71.75,41.58 71.78,41.62 73.65,41.62
  Top 0.305: U$4.P0.0 73.65,41.62 73.65,41.58 82.86,32.38 87.94,32.38 92.39,27.93 JP18.3
  Bottom 0.305: v71.75,41.58 71.05,42.28 SJ7.3
P0_25  (via drill 0.3 pad 0.61)
  Top 0.254: v71.43,39.36 72.42,40.35 U$4.P0.1
  Top 0.305: U$4.P0.1 73.93,40.35 79.05,35.23 79.05,33.33 80.64,31.74 87.31,31.74 89.84,29.2 JP18.4
  Bottom 0.254: SJ8.1 69.53,38.73
  Bottom 0.305: 69.53,38.73 70.16,39.36 v71.43,39.36
P0_26
  Top 0.305: U$4.P0.2 73.93,39.08 78.1,34.91 78.1,33.01 80,31.11 85.4,31.11 87.31,29.2 JP18.5
  Bottom 0.305: SV4.3 87.31,39.99 88.26,39.04 88.26,28.88 87.31,27.93 JP18.5
P0_27
  Top 0.305: U$4.P0.3 73.93,37.81 77.14,34.6 77.14,32.38 79.05,30.47 83.5,30.47 84.77,29.2 JP18.6
  Bottom 0.305: SV4.4 86.67,37.45 87.62,36.5 87.62,29.52 86.99,28.88 85.72,28.88 84.77,27.93 JP18.6
P0_28
  Top 0.305: U$4.P0.4 73.93,36.54 76.19,34.28 76.19,32.06 79.05,29.2 81.59,29.2 82.22,28.57 JP18.7
  Bottom 0.305: LED11.A 81.27,31.83 81.27,28.25 82.22,27.3 JP18.7
P0_29
  Top 0.305: U$4.P0.5 74.25,35.27 75.24,34.28 75.24,31.74 79.05,27.93 79.69,27.93 JP18.8
  Bottom 0.305: LED12.A 80.64,31.83 80.64,28.25 79.69,27.3 JP18.8
P0_30
  Top 0.305: U$4.P0.6 73.33,32.38 77.14,28.57 JP18.9
P0_31
  Top 0.305: U$4.P0.7 70.8,31.74 74.61,27.93 JP18.10
P0_32  (via drill 0.3 pad 0.61)
  Top 0.254: v21.91,65.7 21.95,65.74 23.81,65.74
  Top 0.305: U$5.P0.0 23.81,65.74 23.81,65.7 33.02,56.49 38.1,56.49 42.55,52.05 JP23.3
  Bottom 0.305: v21.91,65.7 21.21,66.4 SJ9.3
P0_33  (via drill 0.3 pad 0.61)
  Top 0.254: v21.59,63.48 22.58,64.47 U$5.P0.1
  Top 0.305: U$5.P0.1 24.09,64.47 29.21,59.35 29.21,57.45 30.8,55.86 37.47,55.86 40.01,53.32 JP23.4
  Bottom 0.254: SJ10.1 19.68,62.84
  Bottom 0.305: 19.68,62.84 20.32,63.48 v21.59,63.48
P0_34
  Top 0.305: U$5.P0.2 24.09,63.2 28.26,59.03 28.26,57.13 30.16,55.23 35.56,55.23 37.47,53.32 JP23.5
  Bottom 0.305: SV5.3 37.47,64.11 38.42,63.16 38.42,53 37.47,52.05 JP23.5
P0_35
  Top 0.305: U$5.P0.3 24.09,61.93 27.3,58.72 27.3,56.49 29.21,54.59 33.66,54.59 34.92,53.32 JP23.6
  Bottom 0.305: SV5.4 36.83,61.58 37.78,60.62 37.78,53.64 37.15,53 35.88,53 34.92,52.05 JP23.6
P0_36
  Top 0.305: U$5.P0.4 24.09,60.66 26.35,58.4 26.35,56.18 29.21,53.32 31.75,53.32 32.38,52.69 JP23.7
  Bottom 0.305: LED14.A 31.43,55.95 31.43,52.37 32.38,51.41 JP23.7
P0_37
  Top 0.305: U$5.P0.5 24.41,59.39 25.4,58.4 25.4,55.86 29.21,52.05 29.84,52.05 JP23.8
  Bottom 0.305: LED15.A 30.8,55.95 30.8,52.37 29.84,51.41 JP23.8
P0_38
  Top 0.305: U$5.P0.6 23.5,56.49 27.3,52.69 JP23.9
P0_39
  Top 0.305: U$5.P0.7 20.95,55.86 24.77,52.05 JP23.10
P0_40  (via drill 0.3 pad 0.61)
  Top 0.254: v71.75,65.7 71.78,65.74 73.65,65.74
  Top 0.305: U$6.P0.0 73.65,65.74 73.65,65.7 82.86,56.49 87.94,56.49 92.39,52.05 JP28.3
  Bottom 0.305: v71.75,65.7 71.05,66.4 SJ11.3
P0_41  (via drill 0.3 pad 0.61)
  Top 0.254: v71.43,63.48 72.42,64.47 U$6.P0.1
  Top 0.305: U$6.P0.1 73.93,64.47 79.05,59.35 79.05,57.45 80.64,55.86 87.31,55.86 89.84,53.32 JP28.4
  Bottom 0.254: SJ12.1 69.53,62.84
  Bottom 0.305: 69.53,62.84 70.16,63.48 v71.43,63.48
P0_42
  Top 0.305: U$6.P0.2 73.93,63.2 78.1,59.03 78.1,57.13 80,55.23 85.4,55.23 87.31,53.32 JP28.5
  Bottom 0.305: SV6.3 87.31,64.11 88.26,63.16 88.26,53 87.31,52.05 JP28.5
P0_43
  Top 0.305: U$6.P0.3 73.93,61.93 77.14,58.72 77.14,56.49 79.05,54.59 83.5,54.59 84.77,53.32 JP28.6
  Bottom 0.305: SV6.4 86.67,61.58 87.62,60.62 87.62,53.64 86.99,53 85.72,53 84.77,52.05 JP28.6
P0_44
  Top 0.305: U$6.P0.4 73.93,60.66 76.19,58.4 76.19,56.18 79.05,53.32 81.59,53.32 82.22,52.69 JP28.7
  Bottom 0.305: LED17.A 81.27,55.95 81.27,52.37 82.22,51.41 JP28.7
P0_45
  Top 0.305: U$6.P0.5 74.25,59.39 75.24,58.4 75.24,55.86 79.05,52.05 79.69,52.05 JP28.8
  Bottom 0.305: LED18.A 80.64,55.95 80.64,52.37 79.69,51.41 JP28.8
P0_46
  Top 0.305: U$6.P0.6 73.33,56.49 77.14,52.69 JP28.9
P0_47
  Top 0.305: U$6.P0.7 70.8,55.86 74.61,52.05 JP28.10
P0_48  (via drill 0.3 pad 0.61)
  Top 0.254: v21.91,89.82 21.95,89.86 23.81,89.86
  Top 0.305: U$7.P0.0 23.81,89.86 23.81,89.82 33.02,80.61 38.1,80.61 42.55,76.17 JP33.3
  Bottom 0.305: v21.91,89.82 21.21,90.52 SJ13.3
P0_49  (via drill 0.3 pad 0.61)
  Top 0.254: v21.59,87.6 22.58,88.59 U$7.P0.1
  Top 0.305: U$7.P0.1 24.09,88.59 29.21,83.47 29.21,81.57 30.8,79.98 37.47,79.98 40.01,77.44 JP33.4
  Bottom 0.254: SJ14.1 19.68,86.97
  Bottom 0.305: 19.68,86.97 20.32,87.6 v21.59,87.6
P0_50
  Top 0.305: U$7.P0.2 24.09,87.32 28.26,83.16 28.26,81.25 30.16,79.34 35.56,79.34 37.47,77.44 JP33.5
  Bottom 0.305: SV7.3 37.47,88.23 38.42,87.28 38.42,77.12 37.47,76.17 JP33.5
P0_51
  Top 0.305: U$7.P0.3 24.09,86.05 27.3,82.84 27.3,80.61 29.21,78.71 33.66,78.71 34.92,77.44 JP33.6
  Bottom 0.305: SV7.4 36.83,85.69 37.78,84.74 37.78,77.76 37.15,77.12 35.88,77.12 34.92,76.17 JP33.6
P0_52
  Top 0.305: U$7.P0.4 24.09,84.78 26.35,82.52 26.35,80.3 29.21,77.44 31.75,77.44 32.38,76.81 JP33.7
  Bottom 0.305: LED20.A 31.43,80.07 31.43,76.49 32.38,75.53 JP33.7
P0_53
  Top 0.305: U$7.P0.5 24.41,83.51 25.4,82.52 25.4,79.98 29.21,76.17 29.84,76.17 JP33.8
  Bottom 0.305: LED21.A 30.8,80.07 30.8,76.49 29.84,75.53 JP33.8
P0_54
  Top 0.305: U$7.P0.6 23.5,80.61 27.3,76.81 JP33.9
P0_55
  Top 0.305: U$7.P0.7 20.95,79.98 24.77,76.17 JP33.10
P0_56  (via drill 0.3 pad 0.61)
  Top 0.254: v71.75,89.82 71.78,89.86 73.65,89.86
  Top 0.305: U$8.P0.0 73.65,89.86 73.65,89.82 82.86,80.61 87.94,80.61 92.39,76.17 JP38.3
  Bottom 0.305: v71.75,89.82 71.05,90.52 SJ15.3
P0_57  (via drill 0.3 pad 0.61)
  Top 0.254: v71.43,87.6 72.42,88.59 U$8.P0.1
  Top 0.305: U$8.P0.1 73.93,88.59 79.05,83.47 79.05,81.57 80.64,79.98 87.31,79.98 89.84,77.44 JP38.4
  Bottom 0.254: SJ16.1 69.53,86.97
  Bottom 0.305: 69.53,86.97 70.16,87.6 v71.43,87.6
P0_58
  Top 0.305: U$8.P0.2 73.93,87.32 78.1,83.16 78.1,81.25 80,79.34 85.4,79.34 87.31,77.44 JP38.5
  Bottom 0.305: SV8.3 87.31,88.23 88.26,87.28 88.26,77.12 87.31,76.17 JP38.5
P0_59
  Top 0.305: U$8.P0.3 73.93,86.05 77.14,82.84 77.14,80.61 79.05,78.71 83.5,78.71 84.77,77.44 JP38.6
  Bottom 0.305: SV8.4 86.67,85.69 87.62,84.74 87.62,77.76 86.99,77.12 85.72,77.12 84.77,76.17 JP38.6
P0_60
  Top 0.305: U$8.P0.4 73.93,84.78 76.19,82.52 76.19,80.3 79.05,77.44 81.59,77.44 82.22,76.81 JP38.7
  Bottom 0.305: LED23.A 81.27,80.07 81.27,76.49 82.22,75.53 JP38.7
P0_61
  Top 0.305: U$8.P0.5 74.25,83.51 75.24,82.52 75.24,79.98 79.05,76.17 79.69,76.17 JP38.8
  Bottom 0.305: LED24.A 80.64,80.07 80.64,76.49 79.69,75.53 JP38.8
P0_62
  Top 0.305: U$8.P0.6 73.33,80.61 77.14,76.81 JP38.9
P0_63
  Top 0.305: U$8.P0.7 70.8,79.98 74.61,76.17 JP38.10
P1_0
  Top 0.305: JP2.11 22.23,3.81 19.61,6.43 U$1.P1.0
P1_1
  Top 0.305: U$1.P1.1 18.34,6.35 19.68,5 JP2.12
P1_2
  Top 0.305: U$1.P1.2 17.14,7.54 JP2.13
P1_3
  Top 0.305: U$1.P1.3 15.79,5.95 14.61,4.76 JP2.14
P1_4
  Top 0.305: U$1.P1.4 14.53,6.27 12.06,3.81 JP2.15
P1_5
  Top 0.305: U$1.P1.5 13.34,7.54 13.34,6.35 11.75,4.76 10.48,4.76 9.53,3.81 JP2.16
P1_6
  Top 0.305: JP2.17 6.99,10.16 7.97,11.15 U$1.P1.6
P1_7
  Top 0.305: U$1.P1.7 7.97,12.42 6.35,10.79 6.35,6.35 4.45,4.45 JP2.18
  Bottom 0.254: JP2.18 4.45,4.45 6.99,6.99 18.41,6.99 19.68,8.26 SJ2.3
P1_8
  Top 0.305: U$2.P1.7 57.81,12.42 56.19,10.79 56.19,6.35 54.28,4.45 JP8.18
  Bottom 0.254: JP8.18 54.28,4.45 56.83,6.99 68.25,6.99 69.53,8.26 SJ4.3
P1_9
  Top 0.305: JP8.17 56.83,10.16 57.81,11.15 U$2.P1.6
P1_10
  Top 0.305: U$2.P1.5 63.17,7.54 63.17,6.35 61.59,4.76 60.32,4.76 59.37,3.81 JP8.16
P1_11
  Top 0.305: U$2.P1.4 64.36,6.27 61.91,3.81 JP8.15
P1_12
  Top 0.305: U$2.P1.3 65.64,5.95 64.44,4.76 JP8.14
P1_13
  Top 0.305: U$2.P1.2 66.98,7.54 JP8.13
P1_14
  Top 0.305: U$2.P1.1 68.17,6.35 69.53,5 JP8.12
P1_15
  Top 0.305: JP8.11 72.06,3.81 69.44,6.43 U$2.P1.0
P1_16
  Top 0.305: U$3.P1.7 7.97,36.54 6.35,34.91 6.35,30.47 4.45,28.57 JP13.18
  Bottom 0.254: JP13.18 4.45,28.57 6.99,31.11 18.41,31.11 19.68,32.38 SJ6.3
P1_17
  Top 0.305: JP13.17 6.99,34.28 7.97,35.27 U$3.P1.6
P1_18
  Top 0.305: U$3.P1.5 13.34,31.66 13.34,30.47 11.75,28.88 10.48,28.88 9.53,27.93 JP13.16
P1_19
  Top 0.305: U$3.P1.4 14.53,30.39 12.06,27.93 JP13.15
P1_20
  Top 0.305: U$3.P1.3 15.79,30.07 14.61,28.88 JP13.14
P1_21
  Top 0.305: U$3.P1.2 17.14,31.66 JP13.13
P1_22
  Top 0.305: U$3.P1.1 18.34,30.47 19.68,29.12 JP13.12
P1_23
  Top 0.305: JP13.11 22.23,27.93 19.61,30.55 U$3.P1.0
P1_24
  Top 0.305: U$4.P1.7 57.81,36.54 56.19,34.91 56.19,30.47 54.28,28.57 JP18.18
  Bottom 0.254: JP18.18 54.28,28.57 56.83,31.11 68.25,31.11 69.53,32.38 SJ8.3
P1_25
  Top 0.305: JP18.17 56.83,34.28 57.81,35.27 U$4.P1.6
P1_26
  Top 0.305: U$4.P1.5 63.17,31.66 63.17,30.47 61.59,28.88 60.32,28.88 59.37,27.93 JP18.16
P1_27
  Top 0.305: U$4.P1.4 64.36,30.39 61.91,27.93 JP18.15
P1_28
  Top 0.305: U$4.P1.3 65.64,30.07 64.44,28.88 JP18.14
P1_29
  Top 0.305: U$4.P1.2 66.98,31.66 JP18.13
P1_30
  Top 0.305: U$4.P1.1 68.17,30.47 69.53,29.12 JP18.12
P1_31
  Top 0.305: JP18.11 72.06,27.93 69.44,30.55 U$4.P1.0
P1_32
  Top 0.305: U$5.P1.7 7.97,60.66 6.35,59.03 6.35,54.59 4.45,52.69 JP23.18
  Bottom 0.254: JP23.18 4.45,52.69 6.99,55.23 18.41,55.23 19.68,56.49 SJ10.3
P1_33
  Top 0.305: JP23.17 6.99,58.4 7.97,59.39 U$5.P1.6
P1_34
  Top 0.305: U$5.P1.5 13.34,55.78 13.34,54.59 11.75,53 10.48,53 9.53,52.05 JP23.16
P1_35
  Top 0.305: U$5.P1.4 14.53,54.51 12.06,52.05 JP23.15
P1_36
  Top 0.305: U$5.P1.3 15.79,54.19 14.61,53 JP23.14
P1_37
  Top 0.305: U$5.P1.2 17.14,55.78 JP23.13
P1_38
  Top 0.305: U$5.P1.1 18.34,54.59 19.68,53.24 JP23.12
P1_39
  Top 0.305: JP23.11 22.23,52.05 19.61,54.67 U$5.P1.0
P1_40
  Top 0.305: U$6.P1.7 57.81,60.66 56.19,59.03 56.19,54.59 54.28,52.69 JP28.18
  Bottom 0.254: JP28.18 54.28,52.69 56.83,55.23 68.25,55.23 69.53,56.49 SJ12.3
P1_41
  Top 0.305: JP28.17 56.83,58.4 57.81,59.39 U$6.P1.6
P1_42
  Top 0.305: U$6.P1.5 63.17,55.78 63.17,54.59 61.59,53 60.32,53 59.37,52.05 JP28.16
P1_43
  Top 0.305: U$6.P1.4 64.36,54.51 61.91,52.05 JP28.15
P1_44
  Top 0.305: U$6.P1.3 65.64,54.19 64.44,53 JP28.14
P1_45
  Top 0.305: U$6.P1.2 66.98,55.78 JP28.13
P1_46
  Top 0.305: U$6.P1.1 68.17,54.59 69.53,53.24 JP28.12
P1_47
  Top 0.305: JP28.11 72.06,52.05 69.44,54.67 U$6.P1.0
P1_48
  Top 0.305: U$7.P1.7 7.97,84.78 6.35,83.16 6.35,78.71 4.45,76.81 JP33.18
  Bottom 0.254: JP33.18 4.45,76.81 6.99,79.34 18.41,79.34 19.68,80.61 SJ14.3
P1_49
  Top 0.305: JP33.17 6.99,82.52 7.97,83.51 U$7.P1.6
P1_50
  Top 0.305: U$7.P1.5 13.34,79.9 13.34,78.71 11.75,77.12 10.48,77.12 9.53,76.17 JP33.16
P1_51
  Top 0.305: U$7.P1.4 14.53,78.63 12.06,76.17 JP33.15
P1_52
  Top 0.305: U$7.P1.3 15.79,78.31 14.61,77.12 JP33.14
P1_53
  Top 0.305: U$7.P1.2 17.14,79.9 JP33.13
P1_54
  Top 0.305: U$7.P1.1 18.34,78.71 19.68,77.36 JP33.12
P1_55
  Top 0.305: JP33.11 22.23,76.17 19.61,78.79 U$7.P1.0
P1_56
  Top 0.305: U$8.P1.7 57.81,84.78 56.19,83.16 56.19,78.71 54.28,76.81 JP38.18
  Bottom 0.254: JP38.18 54.28,76.81 56.83,79.34 68.25,79.34 69.53,80.61 SJ16.3
P1_57
  Top 0.305: JP38.17 56.83,82.52 57.81,83.51 U$8.P1.6
P1_58
  Top 0.305: U$8.P1.5 63.17,79.9 63.17,78.71 61.59,77.12 60.32,77.12 59.37,76.17 JP38.16
P1_59
  Top 0.305: U$8.P1.4 64.36,78.63 61.91,76.17 JP38.15
P1_60
  Top 0.305: U$8.P1.3 65.64,78.31 64.44,77.12 JP38.14
P1_61
  Top 0.305: U$8.P1.2 66.98,79.9 JP38.13
P1_62
  Top 0.305: U$8.P1.1 68.17,78.71 69.53,77.36 JP38.12
P1_63
  Top 0.305: JP38.11 72.06,76.17 69.44,78.79 U$8.P1.0
P2_0
  Top 0.254: 4.45,5.71 5.71,6.99 5.71,11.11 8.29,13.69 U$1.P2.0
  Top 0.305: JP3.1 1.91,4.45 3.17,5.71 4.45,5.71
  Bottom 0.305: JP3.1 1.91,8.17 LED1.A
P2_1
  Top 0.305: JP1.1 5.08,11.43 8.61,14.96 U$1.P2.1
P2_2
  Top 0.305: JP1.2 6.67,13.97 8.93,16.23 U$1.P2.2
P2_3
  Top 0.305: JP6.2 56.51,13.97 58.77,16.23 U$2.P2.2
P2_4
  Top 0.305: JP6.1 54.92,11.43 58.45,14.96 U$2.P2.1
P2_5
  Top 0.254: 54.28,5.71 55.55,6.99 55.55,11.11 58.13,13.69 U$2.P2.0
  Top 0.305: JP7.1 51.74,4.45 53.02,5.71 54.28,5.71
  Bottom 0.305: JP7.1 51.74,8.17 LED4.A
P2_6
  Top 0.305: JP11.2 6.67,38.09 8.93,40.35 U$3.P2.2
P2_7
  Top 0.305: JP11.1 5.08,35.55 8.61,39.08 U$3.P2.1
P2_8
  Top 0.254: 4.45,29.84 5.71,31.11 5.71,35.23 8.29,37.81 U$3.P2.0
  Top 0.305: JP12.1 1.91,28.57 3.17,29.84 4.45,29.84
  Bottom 0.305: JP12.1 1.91,32.29 LED7.A
P2_9
  Top 0.305: JP16.2 56.51,38.09 58.77,40.35 U$4.P2.2
P2_10
  Top 0.305: JP16.1 54.92,35.55 58.45,39.08 U$4.P2.1
P2_11
  Top 0.254: 54.28,29.84 55.55,31.11 55.55,35.23 58.13,37.81 U$4.P2.0
  Top 0.305: JP17.1 51.74,28.57 53.02,29.84 54.28,29.84
  Bottom 0.305: JP17.1 51.74,32.29 LED10.A
P2_12
  Top 0.305: JP21.2 6.67,62.21 8.93,64.47 U$5.P2.2
P2_13
  Top 0.305: JP21.1 5.08,59.67 8.61,63.2 U$5.P2.1
P2_14
  Top 0.254: 4.45,53.95 5.71,55.23 5.71,59.35 8.29,61.93 U$5.P2.0
  Top 0.305: JP22.1 1.91,52.69 3.17,53.95 4.45,53.95
  Bottom 0.305: JP22.1 1.91,56.41 LED13.A
P2_15
  Top 0.305: JP26.2 56.51,62.21 58.77,64.47 U$6.P2.2
P2_16
  Top 0.305: JP26.1 54.92,59.67 58.45,63.2 U$6.P2.1
P2_17
  Top 0.254: 54.28,53.95 55.55,55.23 55.55,59.35 58.13,61.93 U$6.P2.0
  Top 0.305: JP27.1 51.74,52.69 53.02,53.95 54.28,53.95
  Bottom 0.305: JP27.1 51.74,56.41 LED16.A
P2_18
  Top 0.305: JP31.2 6.67,86.33 8.93,88.59 U$7.P2.2
P2_19
  Top 0.305: JP31.1 5.08,83.79 8.61,87.32 U$7.P2.1
P2_20
  Top 0.254: 4.45,78.08 5.71,79.34 5.71,83.47 8.29,86.05 U$7.P2.0
  Top 0.305: JP32.1 1.91,76.81 3.17,78.08 4.45,78.08
  Bottom 0.305: JP32.1 1.91,80.53 LED19.A
P2_21
  Top 0.305: JP36.2 56.51,86.33 58.77,88.59 U$8.P2.2
P2_22
  Top 0.305: JP36.1 54.92,83.79 58.45,87.32 U$8.P2.1
P2_23
  Top 0.254: 54.28,78.08 55.55,79.34 55.55,83.47 58.13,86.05 U$8.P2.0
  Top 0.305: JP37.1 51.74,76.81 53.02,78.08 54.28,78.08
  Bottom 0.305: JP37.1 51.74,80.53 LED22.A
RST  (via drill 0.35 pad 0.61)
  Top 0.305: v22.23,20.95 22.23,20.04 U$1.RST
  Bottom 0.254: JP1.3 3.17,16.51 7.87,21.21
  Bottom 0.305: v22.23,20.95 21.97,21.21 SJ1.1 7.87,21.21
RST1  (via drill 0.35 pad 0.61)
  Top 0.305: v72.06,20.95 72.06,20.04 U$2.RST
  Bottom 0.254: JP6.3 53.02,16.51 57.71,21.21
  Bottom 0.305: v72.06,20.95 71.81,21.21 SJ3.1 57.71,21.21
RST2  (via drill 0.35 pad 0.61)
  Top 0.305: v22.23,45.08 22.23,44.16 U$3.RST
  Bottom 0.254: JP11.3 3.17,40.63 7.87,45.33
  Bottom 0.305: v22.23,45.08 21.97,45.33 SJ5.1 7.87,45.33
RST3  (via drill 0.35 pad 0.61)
  Top 0.305: v72.06,45.08 72.06,44.16 U$4.RST
  Bottom 0.254: JP16.3 53.02,40.63 57.71,45.33
  Bottom 0.305: v72.06,45.08 71.81,45.33 SJ7.1 57.71,45.33
RST4  (via drill 0.35 pad 0.61)
  Top 0.305: v22.23,69.19 22.23,68.28 U$5.RST
  Bottom 0.254: JP21.3 3.17,64.75 7.87,69.45
  Bottom 0.305: v22.23,69.19 21.97,69.45 SJ9.1 7.87,69.45
RST5  (via drill 0.35 pad 0.61)
  Top 0.305: v72.06,69.19 72.06,68.28 U$6.RST
  Bottom 0.254: JP26.3 53.02,64.75 57.71,69.45
  Bottom 0.305: v72.06,69.19 71.81,69.45 SJ11.1 57.71,69.45
RST6  (via drill 0.35 pad 0.61)
  Top 0.305: v22.23,93.31 22.23,92.4 U$7.RST
  Bottom 0.254: JP31.3 3.17,88.87 7.87,93.57
  Bottom 0.305: v22.23,93.31 21.97,93.57 SJ13.1 7.87,93.57
RST7  (via drill 0.35 pad 0.61)
  Top 0.305: v72.06,93.31 72.06,92.4 U$8.RST
  Bottom 0.254: JP36.3 53.02,88.87 57.71,93.57
  Bottom 0.305: v72.06,93.31 71.81,93.57 SJ15.1 57.71,93.57
VCC
  Top 0.305: 45.09,3.17 JP2.2
  Top 0.61: U$1.VCC 10.44,17.5 10.48,17.46
  Top 1.016: JP1.5 3.81,22.86 13.97,22.86 | 45.09,3.17 48.9,6.99 48.9,12.06 | 13.97,22.86 13.97,18.41 13.02,17.46 10.48,17.46 | 13.97,22.86 22.86,22.86 34.92,10.79 37.47,10.79 38.73,12.06 48.9,12.06 | SV1.1 38.1,20.95 38.73,20.32 48.26,20.32 48.9,19.68 48.9,12.06
VCC1
  Top 0.305: 94.92,3.17 JP8.2
  Top 0.61: U$2.VCC 60.28,17.5 60.32,17.46
  Top 1.016: JP6.5 53.65,22.86 63.81,22.86 | 94.92,3.17 98.73,6.99 98.73,12.06 | 63.81,22.86 63.81,18.41 62.86,17.46 60.32,17.46 | 63.81,22.86 72.7,22.86 84.77,10.79 87.31,10.79 88.58,12.06 98.73,12.06 | SV2.1 87.94,20.95 88.58,20.32 98.1,20.32 98.73,19.68 98.73,12.06
VCC2
  Top 0.305: 45.09,27.3 JP13.2
  Top 0.61: U$3.VCC 10.44,41.62 10.48,41.58
  Top 1.016: JP11.5 3.81,46.98 13.97,46.98 | 45.09,27.3 48.9,31.11 48.9,36.19 | 13.97,46.98 13.97,42.53 13.02,41.58 10.48,41.58 | 13.97,46.98 22.86,46.98 34.92,34.91 37.47,34.91 38.73,36.19 48.9,36.19 | SV3.1 38.1,45.08 38.73,44.44 48.26,44.44 48.9,43.8 48.9,36.19
VCC3
  Top 0.305: 94.92,27.3 JP18.2
  Top 0.61: U$4.VCC 60.28,41.62 60.32,41.58
  Top 1.016: JP16.5 53.65,46.98 63.81,46.98 | 94.92,27.3 98.73,31.11 98.73,36.19 | 63.81,46.98 63.81,42.53 62.86,41.58 60.32,41.58 | 63.81,46.98 72.7,46.98 84.77,34.91 87.31,34.91 88.58,36.19 98.73,36.19 | SV4.1 87.94,45.08 88.58,44.44 98.1,44.44 98.73,43.8 98.73,36.19
VCC4
  Top 0.305: 45.09,51.41 JP23.2
  Top 0.61: U$5.VCC 10.44,65.74 10.48,65.7
  Top 1.016: JP21.5 3.81,71.1 13.97,71.1 | 45.09,51.41 48.9,55.23 48.9,60.3 | 13.97,71.1 13.97,66.66 13.02,65.7 10.48,65.7 | 13.97,71.1 22.86,71.1 34.92,59.03 37.47,59.03 38.73,60.3 48.9,60.3 | SV5.1 38.1,69.19 38.73,68.56 48.26,68.56 48.9,67.92 48.9,60.3
VCC5
  Top 0.305: 94.92,51.41 JP28.2
  Top 0.61: U$6.VCC 60.28,65.74 60.32,65.7
  Top 1.016: JP26.5 53.65,71.1 63.81,71.1 | 94.92,51.41 98.73,55.23 98.73,60.3 | 63.81,71.1 63.81,66.66 62.86,65.7 60.32,65.7 | 63.81,71.1 72.7,71.1 84.77,59.03 87.31,59.03 88.58,60.3 98.73,60.3 | SV6.1 87.94,69.19 88.58,68.56 98.1,68.56 98.73,67.92 98.73,60.3
VCC6
  Top 0.305: 45.09,75.53 JP33.2
  Top 0.61: U$7.VCC 10.44,89.86 10.48,89.82
  Top 1.016: JP31.5 3.81,95.22 13.97,95.22 | 45.09,75.53 48.9,79.34 48.9,84.42 | 13.97,95.22 13.97,90.78 13.02,89.82 10.48,89.82 | 13.97,95.22 22.86,95.22 34.92,83.16 37.47,83.16 38.73,84.42 48.9,84.42 | SV7.1 38.1,93.31 38.73,92.68 48.26,92.68 48.9,92.05 48.9,84.42
VCC7
  Top 0.305: 94.92,75.53 JP38.2
  Top 0.61: U$8.VCC 60.28,89.86 60.32,89.82
  Top 1.016: JP36.5 53.65,95.22 63.81,95.22 | 94.92,75.53 98.73,79.34 98.73,84.42 | 63.81,95.22 63.81,90.78 62.86,89.82 60.32,89.82 | 63.81,95.22 72.7,95.22 84.77,83.16 87.31,83.16 88.58,84.42 98.73,84.42 | SV8.1 87.94,93.31 88.58,92.68 98.1,92.68 98.73,92.05 98.73,84.42

## Text on the board
tPlace: VCC | VCC | V | V | GND | G | GND | G | RST | RST | P0.2 | P0.2 | DC | P0.3 | DC | P0.3 | DD | DD | P2.0 | P1.7 | P1.6 | P1.5 | P1.4 | P1.3 | P1.2 | P1.1 | P1.0 | P0.7 | P0.6 | P0.5 | P0.4 | P0.3 | P0.2 | P0.1 | P0.0 | VCC | GND | P2.0 | P1.7 | P1.6 | P1.5 | P1.4 | P1.3 | P1.2 | P1.1 | P1.0 | P0.7 | P0.6 | P0.5 | P0.4 | P0.3 | P0.2 | P0.1 | P0.0 | VCC | GND | VCC | VCC | V | V | GND | G | GND | G | RST | RST | P0.2 | P0.2 | DC | P0.3 | DC | P0.3 | DD | DD | P2.0 | P1.7 | P1.6 | P1.5 | P1.4 | P1.3 | P1.2 | P1.1 | P1.0 | P0.7 | P0.6 | P0.5 | P0.4 | P0.3 | P0.2 | P0.1 | P0.0 | VCC | GND | P2.0 | P1.7 | P1.6 | P1.5 | P1.4 | P1.3 | P1.2 | P1.1 | P1.0 | P0.7 | P0.6 | P0.5 | P0.4 | P0.3 | P0.2 | P0.1 | P0.0 | VCC | GND | VCC | VCC | V | V | GND | G | GND | G | RST | RST | P0.2 | P0.2 | DC | DC | P0.3 | P0.3 | DD | DD | P2.0 | P1.7 | P1.6 | P1.5 | P1.4 | P1.3 | P1.2 | P1.1 | P1.0 | P0.7 | P0.6 | P0.5 | P0.4 | P0.3 | P0.2 | P0.1 | P0.0 | VCC | GND | P2.0 | P1.7 | P1.6 | P1.5 | P1.4 | P1.3 | P1.2 | P1.1 | P1.0 | P0.7 | P0.6 | P0.5 | P0.4 | P0.3 | P0.2 | P0.1 | P0.0 | VCC | GND | VCC | VCC | V | V | GND | GND | G | G | RST | RST | P0.2 | P0.2 | DC | DC | P0.3 | P0.3 | DD | DD | P2.0 | P1.7 | P1.6 | P1.5 | P1.4 | P1.3 | P1.2 | P1.1 | P1.0 | P0.7 | P0.6 | P0.5 | P0.4 | P0.3 | P0.2 | P0.1 | P0.0 | VCC | GND | P2.0 | P1.7 | P1.6 | P1.5 | P1.4 | P1.3 | P1.2 | P1.1 | P1.0 | P0.7 | P0.6 | P0.5 | P0.4 | P0.3 | P0.2 | P0.1 | P0.0 | VCC | GND
bPlace: VCC | VCC | V | V | GND | G | GND | G | RST | P0.2 | RST | P0.2 | DC | DC | DD | P0.3 | DD | P0.3 | E18 Simple Breakout v1.0 / Adam Cooper 2023 | E18 Simple Breakout v1.0 / Adam Cooper 2023 | P2.0 | P1.7 | P1.6 | P1.5 | P1.4 | P1.3 | P1.2 | P1.1 | P1.0 | P0.7 | P0.6 | P0.5 | P0.4 | P0.3 | P0.2 | P0.1 | P0.0 | VCC | GND | P2.0 | P1.7 | P1.6 | P1.5 | P1.4 | P1.3 | P1.2 | P1.1 | P1.0 | P0.7 | P0.6 | P0.5 | P0.4 | P0.3 | P0.2 | P0.1 | P0.0 | VCC | GND | VCC | VCC | V | V | GND | G | GND | G | RST | RST | P0.2 | P0.2 | DC | DC | DD | P0.3 | DD | P0.3 | E18 Simple Breakout v1.0 / Adam Cooper 2023 | E18 Simple Breakout v1.0 / Adam Cooper 2023 | P2.0 | P1.7 | P1.6 | P1.5 | P1.4 | P1.3 | P1.2 | P1.1 | P1.0 | P0.7 | P0.6 | P0.5 | P0.4 | P0.3 | P0.2 | P0.1 | P0.0 | VCC | GND | P2.0 | P1.7 | P1.6 | P1.5 | P1.4 | P1.3 | P1.2 | P1.1 | P1.0 | P0.7 | P0.6 | P0.5 | P0.4 | P0.3 | P0.2 | P0.1 | P0.0 | VCC | GND | VCC | VCC | V | V | GND | G | GND | G | RST | RST | P0.2 | P0.2 | DC | DC | DD | P0.3 | DD | P0.3 | E18 Simple Breakout v1.0 / Adam Cooper 2023 | E18 Simple Breakout v1.0 / Adam Cooper 2023 | P2.0 | P1.7 | P1.6 | P1.5 | P1.4 | P1.3 | P1.2 | P1.1 | P1.0 | P0.7 | P0.6 | P0.5 | P0.4 | P0.3 | P0.2 | P0.1 | P0.0 | VCC | GND | P2.0 | P1.7 | P1.6 | P1.5 | P1.4 | P1.3 | P1.2 | P1.1 | P1.0 | P0.7 | P0.6 | P0.5 | P0.4 | P0.3 | P0.2 | P0.1 | P0.0 | VCC | GND | VCC | VCC | V | V | GND | GND | G | G | RST | RST | P0.2 | P0.2 | DC | DC | DD | P0.3 | DD | P0.3 | E18 Simple Breakout v1.0 / Adam Cooper 2023 | E18 Simple Breakout v1.0 / Adam Cooper 2023 | P2.0 | P1.7 | P1.6 | P1.5 | P1.4 | P1.3 | P1.2 | P1.1 | P1.0 | P0.7 | P0.6 | P0.5 | P0.4 | P0.3 | P0.2 | P0.1 | P0.0 | VCC | GND | P2.0 | P1.7 | P1.6 | P1.5 | P1.4 | P1.3 | P1.2 | P1.1 | P1.0 | P0.7 | P0.6 | P0.5 | P0.4 | P0.3 | P0.2 | P0.1 | P0.0 | VCC | GND
Milling: v-score | v-score | v-score | v-score
_bPlace: SJ1 | SJ1 | SJ2 | SJ2 | SJ1 | SJ1 | SJ2 | SJ2 | SJ1 | SJ1 | SJ2 | SJ2 | SJ1 | SJ1 | SJ2 | SJ2
_bNames: SJ1 | SJ1 | SJ2 | SJ2 | SJ1 | SJ1 | SJ2 | SJ2 | SJ1 | SJ1 | SJ2 | SJ2 | SJ1 | SJ1 | SJ2 | SJ2